# Altium PCB Battery Fan Board_May 22.PcbDoc
Units mm, origin at the board's own origin, x right, y up, seen from the top; angles counter-clockwise.
Board outline 48.77 x 49.53 mm, 2 copper layers (Top Layer, Bottom Layer); 5 components, 2 nets, 20 pads, 0 vias.
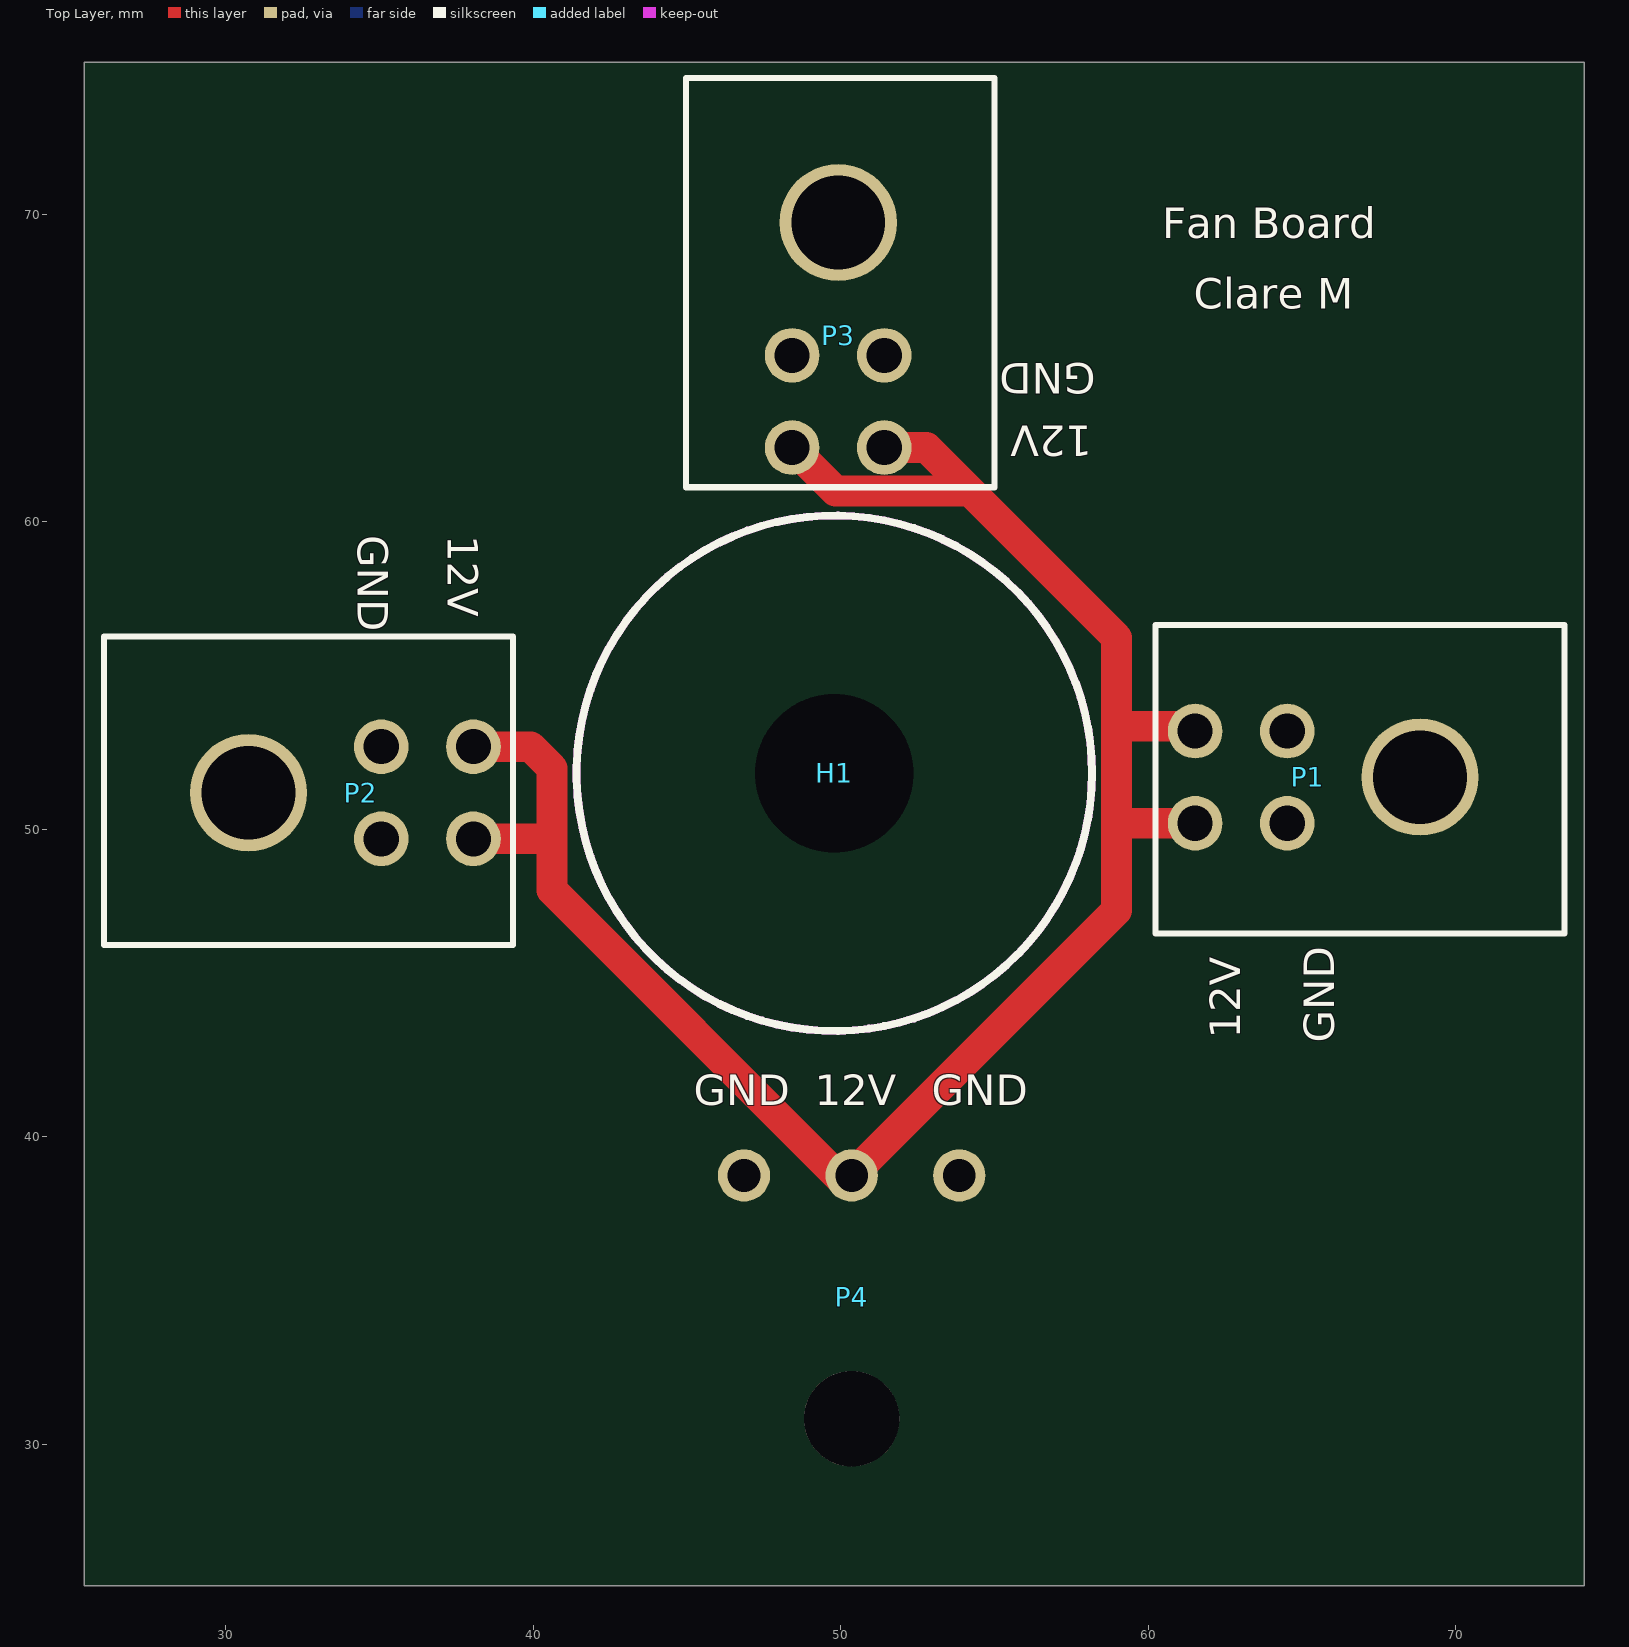
[diagram p0: Top Layer view]
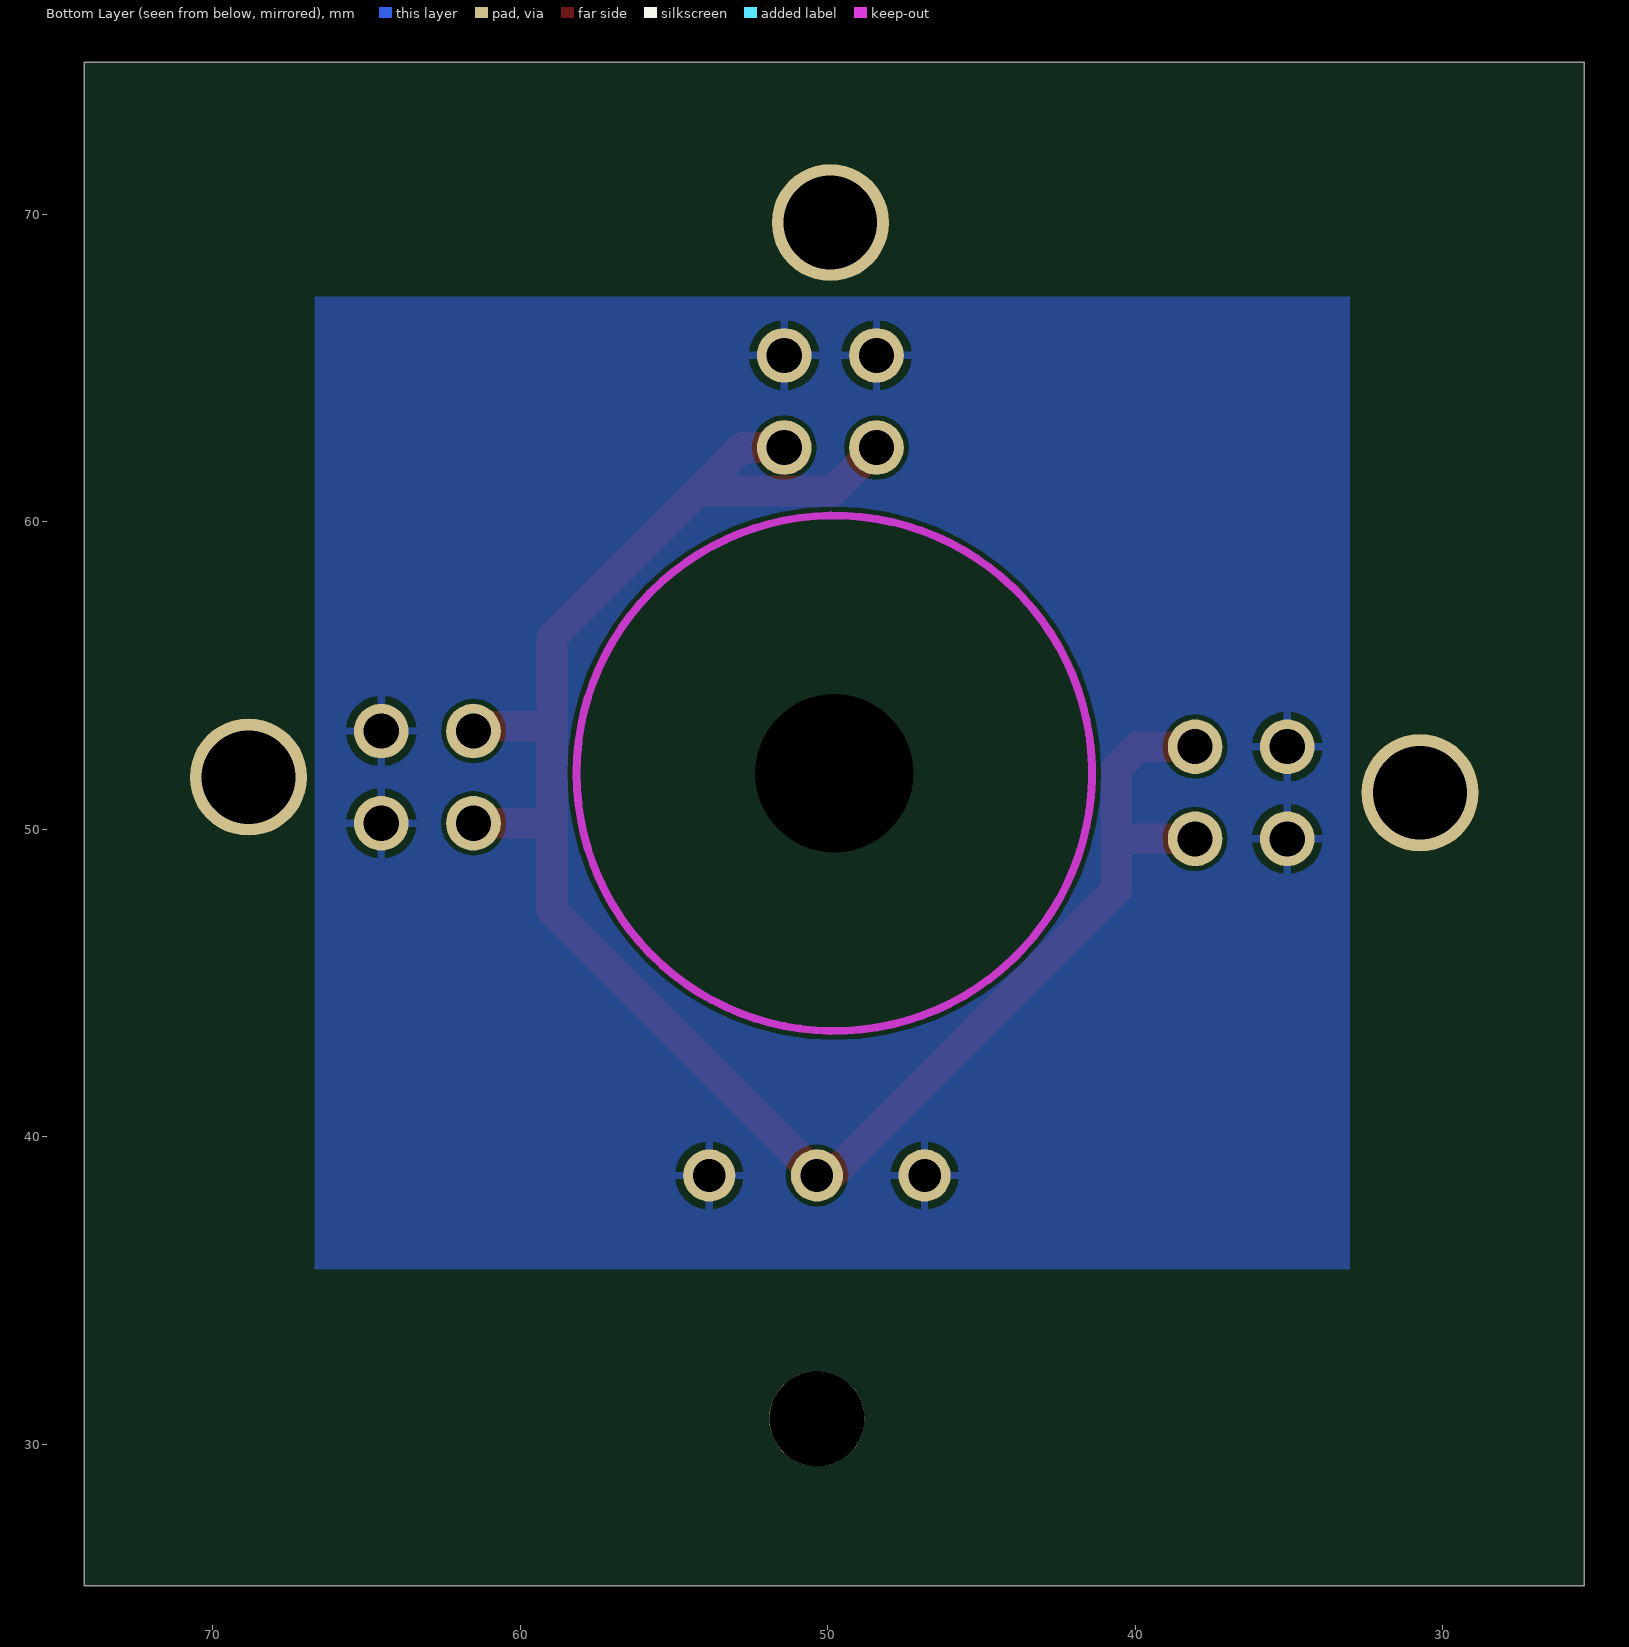
[diagram p1: Bottom Layer view, seen from below]
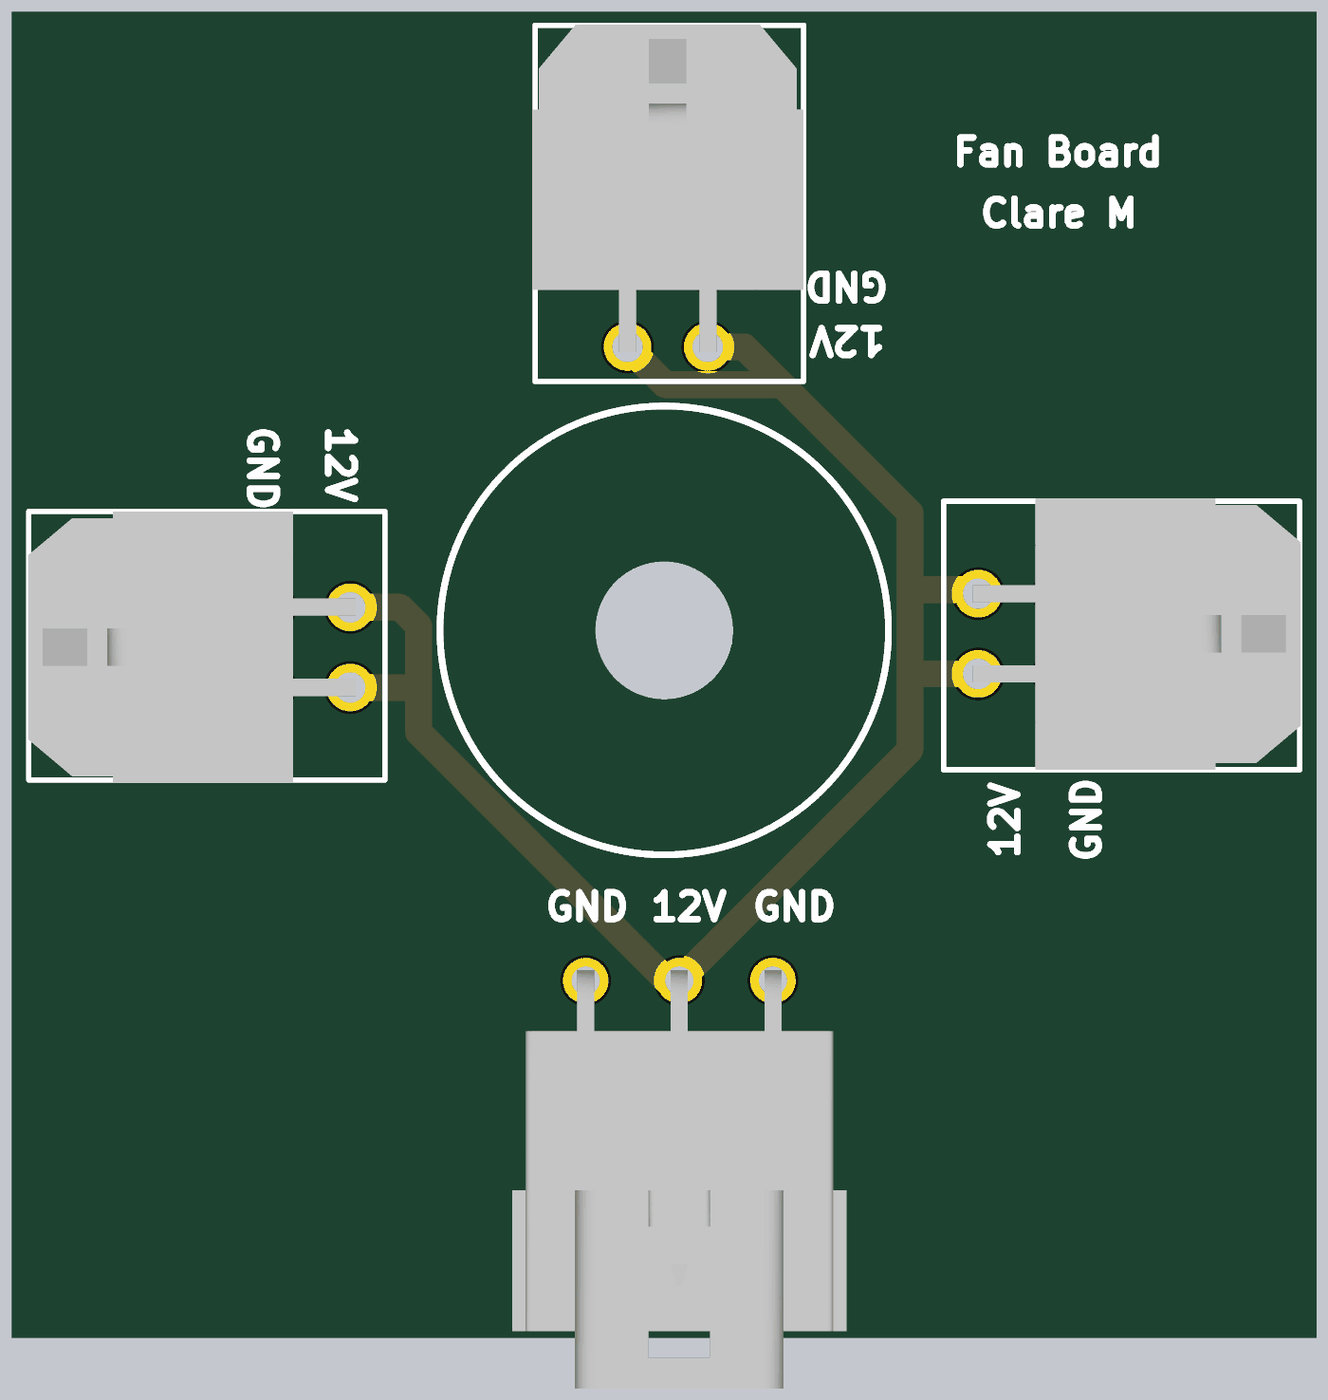
[diagram p2: 3D render of the assembled board from above, using the file's embedded part models]

## Layer stack, top to bottom
Top Solder: solder mask 0.0102, Solder Resist, Dk 3.5
Top Layer: signal copper 0.0356
Dielectric 1: dielectric 0.32, FR-4, Dk 4.8
Bottom Layer: signal copper 0.0356
Bottom Solder: solder mask 0.0102, Solder Resist, Dk 3.5

## Board outline
25.4,25.4 74.168,25.4 74.168,74.93 25.4,74.93

## Design rules (kind name [scope] priority, off if disabled: settings)
BoardOutlineClearance [All] p1: gap=0.3 ignorepadtopadclearanceinfootprint=FALSE
Clearance [All] p1: gap=0.152 ignorepadtopadclearanceinfootprint=FALSE except(0: Arc-Hole Track-Hole SMDPad-Hole THPad-Hole Via-Hole Fill-Hole Poly-Hole Region-Hole Text-Hole)
ComponentClearance [All] p1: gap=0.1 collisioncheckmode=3 verticalgap=0.254 showdistances=FALSE
FabricationTestPointUsage TestPointUsage [All] p1: valid=0 allowmultiple=FALSE
FabricationTestpoint Testpoint [All] p1: side=3 testpointundercomponent=TRUE minsize=1.016 maxsize=2.54 preferedsize=1.524 minholesize=0 maxholesize=1.016 preferedholesize=0.813 testpointgrid=0.025 allowsidetop=TRUE allowsidebottom=TRUE usegrid=TRUE gridtolerance=0
HoleSize [All] p1: absolutevalues=TRUE maxlimit=6.3 minlimit=0.3 maxpercent=80.000 minpercent=20.000
HoleToHoleClearance [All] p1: gap=0.45 allowstackedmicrovias=TRUE
MinimumAnnularRing [All] p1: minimumring=0.15
MinimumSolderMaskSliver [All] p1: minsoldermaskwidth=0.075
PlaneClearance [All] p1: clearance=0.5
PlaneConnect [All] p1: planeconnectstyle=Direct reliefexpansion=0.508 reliefentries=4 reliefconductorwidth=0.254 reliefairgap=0.254
PolygonConnect "GND Via" [isVia AND InNet('GND')] p1: connectstyle=Direct reliefconductorwidth=0.254 reliefentries=4 polygonreliefangle="90 Angle" airgapwidth=0.254 // GND Via Connection
PolygonConnect [All] p2: connectstyle=Relief reliefconductorwidth=0.254 reliefentries=4 polygonreliefangle="90 Angle" airgapwidth=0.25
RoutingVias [All] p1: holewidth=0.3 width=0.6 viastyle="Through Hole" minholewidth=0.3 minwidth=0.6 maxholewidth=6.3 maxwidth=6.6
SilkToSilkClearance [All] p1: silktosilkclearance=0.15
SilkToSolderMaskClearance SilkscreenOverComponentPads [IsPad] p1: minsilkscreentomaskgap=0.25 clearancetoexposedcopper=TRUE
SolderMaskExpansion [All] p1: expansion=0.1
Width [All] p1: maxlimit=2 minlimit=0.152 preferedwidth=0.25 minimp=50.000000 maximp=50.000000 favimp=50.000000
20 further rules are at their usual default settings.

## Classes and differential pairs
component class "Battery Fan Board_March 27": H1 P1 P2 P3

## Components (designator, comment, footprint, x,y, rotation, side; value= is the part's Value field where it differs from the comment)
H1 "Hole M4" #10Hole 32.258,38.227 r0 top
P1 "MLX_MICROFIT_2X2" MLX_MICROFIT_2X2 66.802,51.689 r90 top
P2 "MLX_MICROFIT_2X2" MLX_MICROFIT_2X2 32.766,51.181 r270 top
P3 "MLX_MICROFIT_2X2" MLX_MICROFIT_2X2 49.911,67.691 r180 top
P4 "Molex Ultrafit 3x1" Molex-Ultrafit-3x1 50.348,30.825 r0 top

## Footprints (in the part's own frame and the unit in brackets; to place one, negate y for a bottom-side part, rotate by r counter-clockwise, add the part's x,y. Pads: shape width x height; smd on the part's side, far side on the other; paste and mask are expansions set on the pad)
#10Hole [mil]
  round 0 hole 202.76 unplated mask+78.74: 1(690,535)
  Keep-Out Layer circle w10: c690,535 r330
  silkscreen extent 360,205 1020,865
MLX_MICROFIT_2X2 [mil]
  round 70 hole 45: 1(59,90) 2(-59,90) 3(59,208) 4(-59,208)
  round 150 hole 120: ""(0,-80)
  silkscreen extent -200,-265 195,259, body extent -200,-266 200,216, height 345
Molex-Ultrafit-3x1 [mm] "Molex Ultrafit 3x1 - 172310-1303"
  round 3.1 hole 3.1 unplated: 0(0,0)
  round 1.7 hole 1.06: 1(-3.5,7.91) 2(0,7.91) 3(3.5,7.91)
  body extent -6.25,-7.33 6.25,8.3, height 8.96

## Part data
H1: library part #10Hole
P4: library part Molex-Ultrafit-3x1, "Molex Ultrafit 3x1 - 172310-1303"

## Nets (pads, with @x,y where several pads share a name; then routed paths per layer and width w, separated by ;. In a path a pad name is that pad's centre, name@x,y a point inside that pad or via, vN(x,y) a via of type N, cw(c..) or ccw(c..) an arc to the next point about the centre after c; other vN are vias at no path point)
12V: P1.3 P1.4 P2.3 P2.4 P3.3 P3.4 P4.2 | length 65.9
  Top Layer w0.5: P3.3@48.127,62.789 P3.3@48.285,62.789
  Top Layer w1: P2.3 40.578,49.682 40.603,49.657 ; P2.4 39.903,52.68 40.603,51.98 40.603,49.657 ; P3.3 49.823,60.997 54.192,60.997 ; P3.4 52.781,62.408 54.192,60.997 ; P1.4 59.067,50.19 58.965,50.292 ; P1.3 61.366,53.34 58.965,53.34 ; 40.603,49.657 40.603,48.013 49.881,38.735 P4.2 58.965,47.352 58.965,50.292 ; 54.192,60.997 58.965,56.224 58.965,53.34 ; 58.965,50.292 58.965,53.34
GND: P1.1 P1.2 P2.1 P2.2 P3.1 P3.2 P4.1 P4.3
pads on no net: H1.1 P1. P2. P3. P4.0

## Polygon pours and split planes (outlines as drawn)
GND on Bottom Layer "Bottom Layer - GND" (solid, remove dead copper, pour order 2): 33.02,67.31 33.02,35.687 66.675,35.687 66.675,67.31

## Silkscreen, mask and mechanical layers (free items; w line width, h text height)
Top Overlay:
  text "Fan Board" at 60.452,69.215 h1
  text "Clare M" at 61.468,66.929 h1
  text "GND" at 58.293,65.151 h1 r180
  text "12V" at 58.166,63.119 h1 r180
  text "GND" at 34.29,59.563 h1 r270
  text "12V" at 37.211,59.563 h1 r270
  text "12V" at 62.992,43.18 h1 r90
  text "GND" at 66.04,43.053 h1 r90
  text "GND" at 45.212,41.021 h1
  text "12V" at 49.149,41.021 h1
  text "GND" at 52.959,41.021 h1
Mechanical 2:
  lines w0.254: 25.4,25.4 25.4,31.623 25.4,74.93 74.168,74.93 74.168,25.4 25.4,25.4